# Altium PCB PCB1.PcbDoc
Units mil, origin at the board's own origin, x right, y up, seen from the top; angles counter-clockwise.
Board outline 1628.8 x 2691.79 mil, 2 copper layers (Top Layer, Bottom Layer); 32 components, 24 nets, 140 pads, 4 vias.
Unrouted connection lines stored in the file: 74.
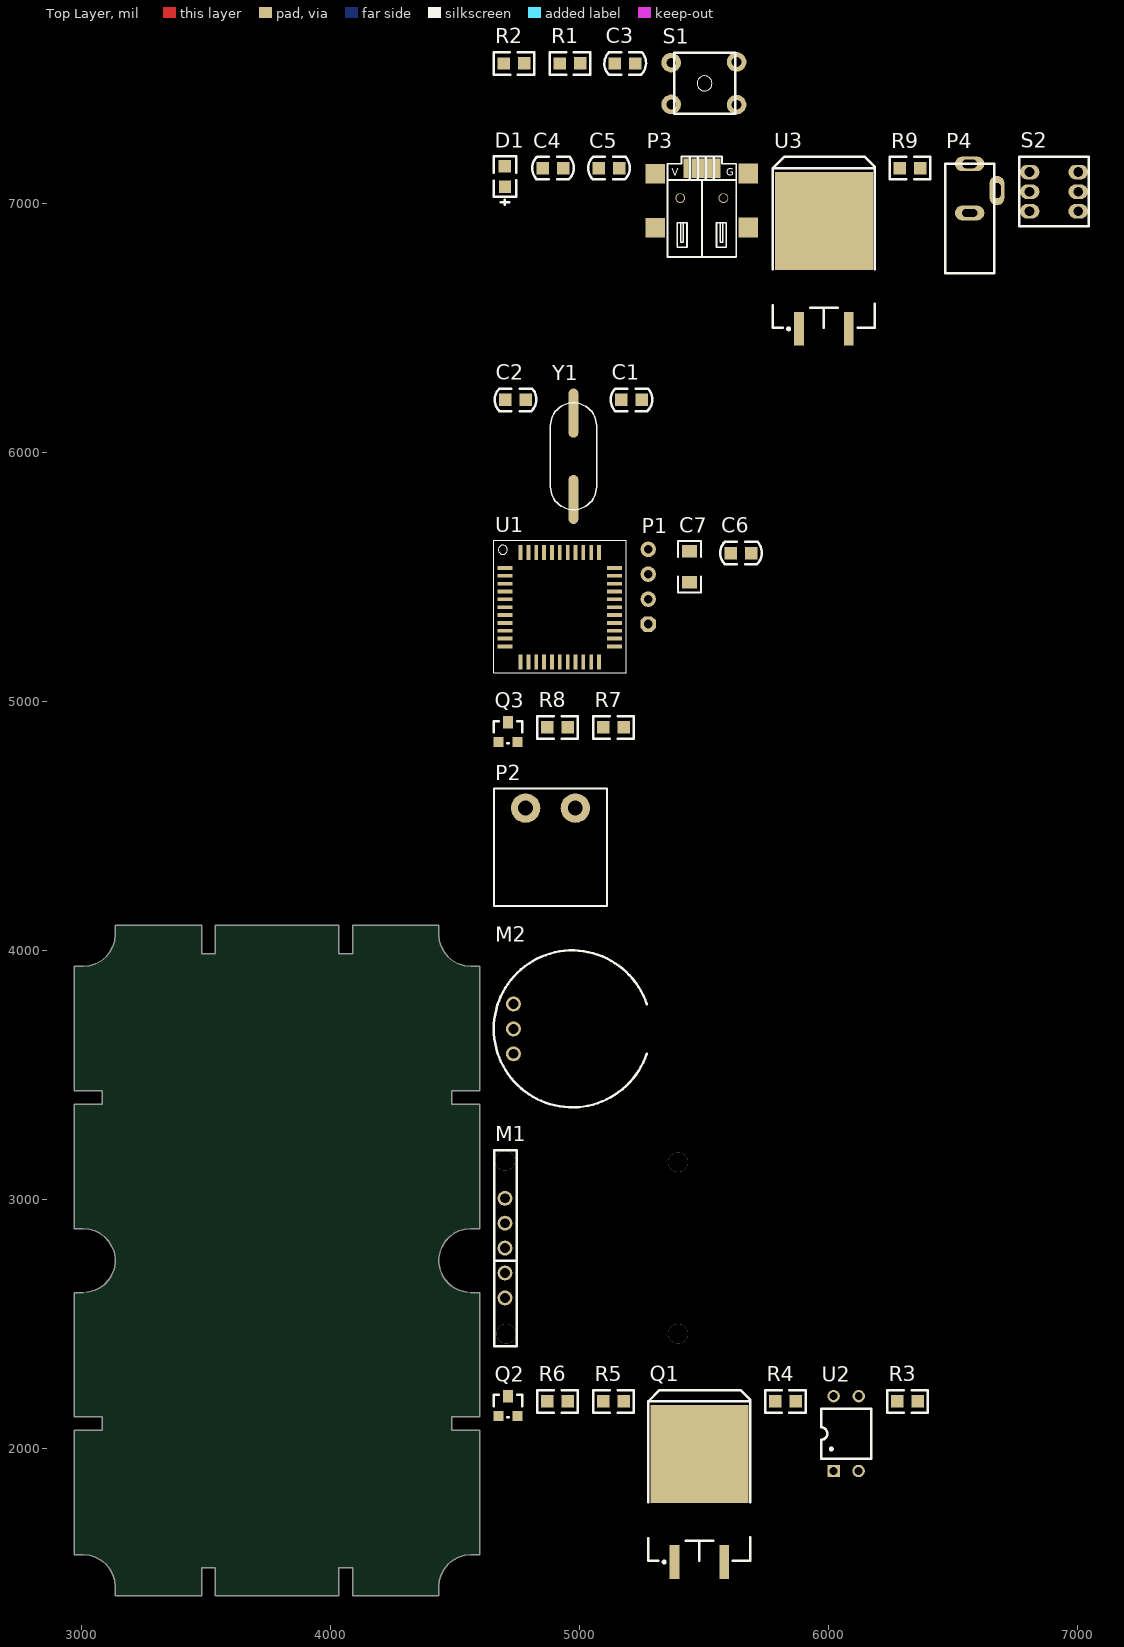
[diagram p0: Top Layer view]
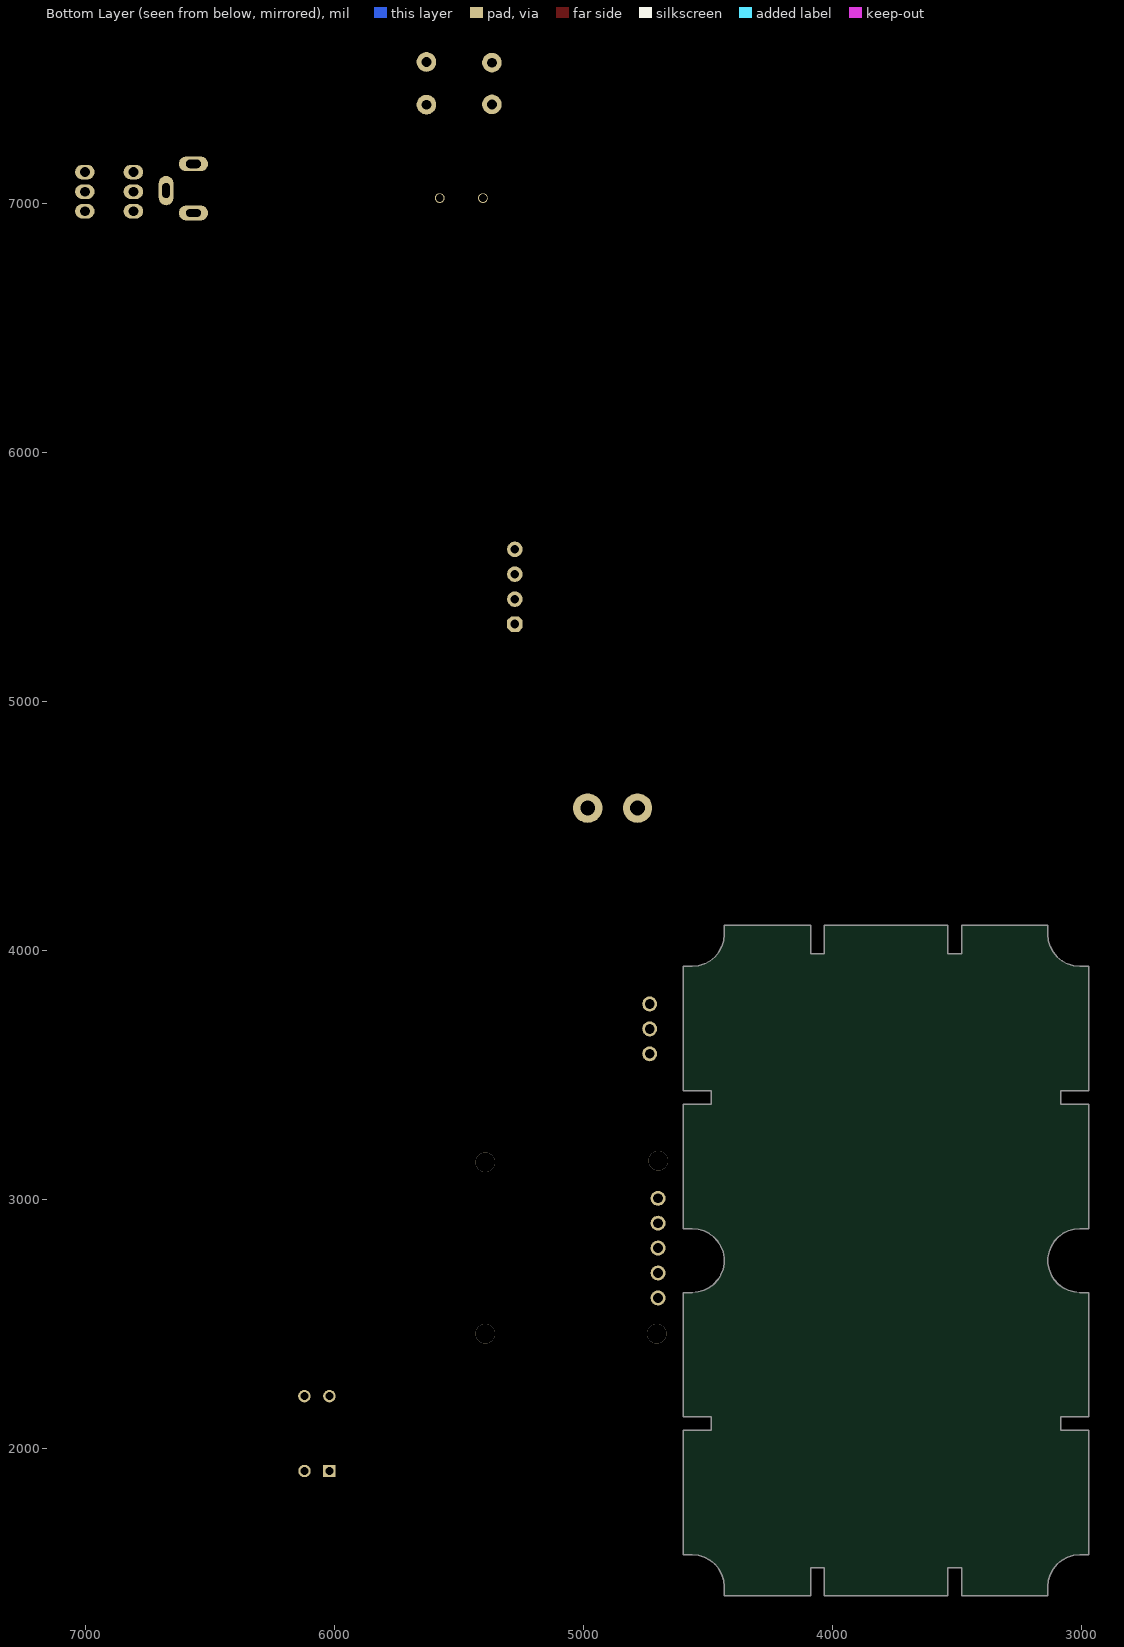
[diagram p1: Bottom Layer view, seen from below]

## Layer stack, top to bottom
Top Solder: solder mask 0.4, Solder Resist, Dk 3.5
Top Layer: signal copper 1.4
Dielectric 1: dielectric 12.6, FR-4, Dk 4.8
Bottom Layer: signal copper 1.4
Bottom Solder: solder mask 0.4, Solder Resist, Dk 3.5

## Board outline
4599.4,3381.97 4485.79,3381.97 4485.79,3437.09 4599.4,3437.09 4599.4,3935.84 4562.56,3935.84 4537.55,3938.3 4513.49,3945.6 4491.33,3957.45 4471.9,3973.39 4455.95,3992.82 4444.1,4014.99 4436.81,4039.04 4434.34,4064.05 4434.34,4100.89 4088.15,4100.89 4088.15,3987.28 4033.03,3987.28 4033.03,4100.89 3536.97,4100.89 3536.97,3987.28 3481.85,3987.28 3481.85,4100.89 3135.66,4100.89 3135.66,4064.05 3133.19,4039.04 3125.9,4014.99 3114.05,3992.82 3098.1,3973.39 3078.67,3957.45 3056.51,3945.6 3032.45,3938.3 3007.44,3935.84 2970.6,3935.84 2970.6,3437.09 3084.21,3437.09 3084.21,3381.97 2970.6,3381.97 2970.6,2883.22 3007.44,2883.22 3031,2881.03 3053.76,2874.56 3074.94,2864.01 3093.82,2849.75 3109.76,2832.27 3122.21,2812.15 3130.76,2790.09 3135.11,2766.83 3135.11,2743.17 3130.76,2719.91 3122.21,2697.85 3109.76,2677.73 3093.82,2660.25 3074.94,2645.99 3053.76,2635.44 3031,2628.97 3007.44,2626.78 2970.6,2626.78 2970.6,2128.03 3084.21,2128.03 3084.21,2072.91 2970.6,2072.91 2970.6,1574.16 3007.44,1574.16 3032.45,1571.7 3056.51,1564.4 3078.67,1552.55 3098.1,1536.61 3114.05,1517.18 3125.9,1495.01 3133.19,1470.96 3135.66,1445.94 3135.66,1409.11 3481.85,1409.11 3481.85,1522.72 3536.97,1522.72 3536.97,1409.11 4033.03,1409.11 4033.03,1522.72 4088.15,1522.72 4088.15,1409.11 4434.34,1409.11 4434.34,1445.94 4436.81,1470.96 4444.1,1495.01 4455.95,1517.18 4471.9,1536.61 4491.33,1552.55 4513.49,1564.4 4537.55,1571.7 4562.56,1574.16 4599.4,1574.16 4599.4,2072.91 4485.79,2072.91 4485.79,2128.03 4599.4,2128.03 4599.4,2626.78 4562.56,2626.78 4539,2628.97 4516.24,2635.44 4495.06,2645.99 4476.18,2660.25 4460.24,2677.73 4447.79,2697.85 4439.24,2719.91 4434.89,2743.17 4434.89,2766.83 4439.24,2790.09 4447.79,2812.15 4460.24,2832.27 4476.18,2849.75 4495.06,2864.01 4516.24,2874.56 4539,2881.03 4562.56,2883.22 4599.4,2883.22

## Design rules (kind name [scope] priority, off if disabled: settings)
Clearance [All] p1: gap=10
PolygonConnect [All] p1: connectstyle=Relief reliefconductorwidth=10 reliefentries=4 polygonreliefangle="90 Angle" airgapwidth=10
RoomDefinition Reset [InComponentClass('Reset')] p1: confinementstyle=ConfineIn formatcopy=TRUE lockcomponents=FALSE outline 4645,7345 5680,7345 5680,7720 4645,7720
RoomDefinition Power [InComponentClass('Power')] p2: confinementstyle=ConfineIn formatcopy=TRUE lockcomponents=FALSE outline 4640,6415 7055,6415 7055,7300 4640,7300
RoomDefinition Oscillator [InComponentClass('Oscillator')] p3: confinementstyle=ConfineIn formatcopy=TRUE lockcomponents=FALSE outline 4645,5700 5305,5700 5305,6370 4645,6370
RoomDefinition Microcontroller_STC12C5A60S2 [InComponentClass('Microcontroller_STC12C5A60S2')] p4: confinementstyle=ConfineIn formatcopy=TRUE lockcomponents=FALSE outline 4645,5105 5745,5105 5745,5755 4645,5755
RoomDefinition Level_Switch [InComponentClass('Level_Switch')] p5: confinementstyle=ConfineIn formatcopy=TRUE lockcomponents=FALSE outline 4640,4805 5230,4805 5230,5055 4640,5055
RoomDefinition LED [InComponentClass('LED')] p6: confinementstyle=ConfineIn formatcopy=TRUE lockcomponents=FALSE outline 4645,4165 5120,4165 5120,4760 4645,4760
RoomDefinition Human_Body_Detection [InComponentClass('Human_Body_Detection')] p7: confinementstyle=ConfineIn formatcopy=TRUE lockcomponents=FALSE outline 4645,3360 5300,3360 5300,4110 4645,4110
RoomDefinition Gesture_Recognition [InComponentClass('Gesture_Recognition')] p8: confinementstyle=ConfineIn formatcopy=TRUE lockcomponents=FALSE outline 4645,2400 5450,2400 5450,3310 4645,3310
RoomDefinition Amplifier [InComponentClass('Amplifier')] p9: confinementstyle=ConfineIn formatcopy=TRUE lockcomponents=FALSE outline 4640,1465 6410,1465 6410,2350 4640,2350
RoutingVias [All] p1: holewidth=28 width=50 viastyle="Through Hole" minholewidth=28 minwidth=50 maxholewidth=28 maxwidth=50
SolderMaskExpansion [All] p1: expansion=4
Width [All] p1: maxlimit=10 minlimit=10 preferedwidth=10
29 further rules are at their usual default settings.

## Classes and differential pairs
component class Reset: C3 R1 R2 S1
component class Power: C4 C5 D1 P3 P4 R9 S2 U3
component class Oscillator: C1 C2 Y1
component class Microcontroller_STC12C5A60S2: C6 C7 P1 U1
component class Level_Switch: Q3 R7 R8
component class LED: P2
component class Human_Body_Detection: M2
component class Gesture_Recognition: M1
component class Amplifier: Q1 Q2 R3 R4 R5 R6 U2

## Components (designator, comment, footprint, x,y, rotation, side; value= is the part's Value field where it differs from the comment)
C1 "Cap" C0805 5160,6210 r0 top
C2 "Cap" C0805 4695,6210 r0 top
C3 "Cap" C0805 5135,7560 r0 top
C4 "Cap" C0805 4845,7140 r0 top
C5 "Cap" C0805 5070,7140 r0 top
C6 "Cap" C0805 5600,5595 r0 top
C7 "Cap" 1206C 5440,5540 r90 top
D1 "LED" L0805R 4700,7065 r90 top
M1 "PAJ7620U2" PAJ7620U2_Interface 5050,2805 r0 top
M2 "Human_Sensor" PM-6 4970,3685 r0 top
P1 "Header 4" HDR1X4HA 5275,5310 r90 top
P2 "Header 2" CCM-5.08-2P 4655,4650 r0 top
P3 "USB" USB-MINI 5490,6975 r0 top
P4 "Power_Connect" DC_002 6565,6960 r90 top
Q1 "MOSFET-N" TO-263 5480,1545 r0 top
Q2 "NPN" SOT-23 4670,2130 r0 top
Q3 "NPN" SOT-23 4670,4835 r0 top
R1 "Res1" R0805 4920,7560 r0 top
R2 "Res1" R0805 4695,7560 r0 top
R3 "Res1" R0805 6275,2190 r0 top
R4 "Res1" R0805 5785,2190 r0 top
R5 "Res1" R0805 5095,2190 r0 top
R6 "Res1" R0805 4870,2190 r0 top
R7 "Res1" R0805 5095,4895 r0 top
R8 "Res1" R0805 4870,4895 r0 top
R9 "Res1" R0805 6285,7140 r0 top
S1 "SW-PB" KEY-DIP4 5500,7480 r0 top
S2 "SW-PB" SW7X7 6765,7185 r0 top
U1 "STC12C5A60S2_44PIN" STC12C5A60S2_44PIN 4700,5535 r0 top
U2 "Optoisolator1" DIP_4 6175,2065 r0 top
U3 "LM7805" TO-263 5980,6495 r0 top
Y1 "XTAL" XTAL-HC49S-SMD 4975,5885 r90 top

## Footprints (in the part's own frame and the unit in brackets; to place one, negate y for a bottom-side part, rotate by r counter-clockwise, add the part's x,y. Pads: shape width x height; smd on the part's side, far side on the other; paste and mask are expansions set on the pad)
1206C [mil] "3.2mmx1.6mm（蒜米工坊）"
  rect 50x60 smd: 1(-62,0) 2(62,0)
  silkscreen extent -103,-46 103,46, body extent -64,-32 62,31, height 24
C0805 [mil]
  rect 50x50 smd: 1(6,0) 2(88.7,-0.1)
  silkscreen extent -36,-45 131,45, body extent -6,-26 112,29, height 37
CCM-5.08-2P [mm]
  round 3 hole 1.5: 1(3.24,-2) 2(8.32,-2)
  silkscreen extent 0,-12 11.56,0, body extent 0.06,-12 11.62,0, height 8.5
DC_002 [mm]
  round 1.5 hole 0.8: 1(0,0.356) 1(0,-0.381) 2(5.004,-0.33) 2(5.004,0.33) 3(1.956,-2.794) 3(2.642,-2.794)
  oval 1.5x3 hole 0.8 slot 1.5 at 90 deg: 1(0,0)
  oval 1.5x3 hole 0.86 slot 1.5 at 90 deg: 2(5.004,0)
  oval 3x1.5 hole 0.8 slot 1.5 at 0 deg: 3(2.286,-2.794)
  silkscreen extent -6.12,-2.51 5,2.49, body extent -6.26,-2.96 5.34,2.44, height 7.4
DIP_4 [mil]
  rect 50x50 hole 32: 1(-155.68,-154.68)
  round 50 hole 32: 2(-55.68,-154.68) 3(-55,145.5) 4(-155.5,145.5)
  silkscreen extent -206,-105 -5,95, body extent -214,-162 4,152, height 168
HDR1X4HA [mil]
  oct 62x62 hole 35: 1(0,0)
  round 62 hole 35: 2(100,0) 3(200,0) 4(300,0)
KEY-DIP4 [mm] "6X6"
  round 2 hole 1: 1(-3.373,2.116) 1(3.299,2.189) 2(-3.373,-2.134) 2(3.299,-2.172)
  silkscreen extent -3.06,-3.09 3.13,3.1, body extent -4.12,-3.27 4.14,3.23, height 4.3
L0805R [mil] "1/8W"
  rect 50x50 smd: 1(0,0) 2(82.3,0.2)
  silkscreen extent -72,-45 122,45, body extent 0,-25 79,25, height 43
PAJ7620U2_Interface [mil]
  round 60 hole 39.37: 1(-350,-200) 2(-350,-100) 3(-350,0) 4(-350,100) 5(-350,200)
  silkscreen extent -394,-394 -303,394, body extent -394,-394 394,394, height 210
PM-6 [mil] "Human_Sensor"
  round 60 hole 39.37: 1(-236.22,-100) 2(-236.22,0) 3(-236.22,100)
  silkscreen extent -315,-315 299,315, body extent -306,-300 321,319, height 460
R0805 [mil] "1/8W"
  rect 50x50 smd: 1(0,0) 2(82.3,0.2)
  silkscreen extent -40,-45 122,45, body extent 1,-24 80,25, height 22
SOT-23 [mil]
  rect 40x40 smd: 1(4.88,0.63) 2(79.88,0.63)
  rect 40x50 smd: 3(41.88,80.63)
  silkscreen extent -15,-4 100,86, body extent -15,-11 99,99, height 47
STC12C5A60S2_44PIN [mil]
  rect 60x15 smd: 1(-0.01,-0.03) 2(-0.01,-31.53) 3(-0.01,-63.02) 4(-0.01,-94.52) 5(-0.01,-126.02) 6(-0.01,-157.51) 7(-0.01,-189.01) 8(-0.01,-220.5) 9(-0.01,-252) 10(-0.01,-283.5) 11(-0.01,-314.99) 23(439.99,-314.99) 24(439.99,-283.5) 25(439.99,-252) 26(439.99,-220.5) 27(439.99,-189.01) 28(439.99,-157.51) 29(439.99,-126.02) 30(439.99,-94.52) 31(439.99,-63.02) 32(439.99,-31.53) 33(439.99,-0.03)
  rect 15x60 smd: 12(62.51,-377.51) 13(94.01,-377.51) 14(125.5,-377.51) 15(157,-377.51) 16(188.5,-377.51) 17(219.99,-377.51) 18(251.49,-377.51) 19(282.98,-377.51) 20(314.48,-377.51) 21(345.98,-377.51) 22(377.47,-377.51) 34(377.47,62.49) 35(345.98,62.49) 36(314.48,62.49) 37(282.98,62.49) 38(251.49,62.49) 39(219.99,62.49) 40(188.5,62.49) 41(157,62.49) 42(125.5,62.49) 43(94.01,62.49) 44(62.51,62.49)
  silkscreen extent -46,-420 486,111, body extent -16,-396 456,76, height 41
SW7X7 [mm]
  oval 2x1.5 hole 1: 1(1.041,-1.549) 1(5.994,-1.549) 2(1.041,-3.543) 2(5.994,-3.543) 3(1.041,-5.537) 3(5.994,-5.537)
  silkscreen extent 0,-7.09 7.09,0.03, body extent -0.02,-7.09 6.98,-0.09, height 13
TO-263 [mm]
  rect 1x3.45 smd: 1(-2.54,0) 3(2.54,0)
  rect 10x10 smd: 2(0,11)
  silkscreen extent -5.21,-0.12 5.21,17.53, body extent -5.08,-0.65 5.08,14.61, height 4.88
USB-MINI [mm]
  rect 2x2 smd: 0(-4.746,-1.872) 0(-4.746,3.612)
  round 1 hole 0.8: 0(-2.2,1.128) 0(2.2,1.128)
  rect 2x2.032 smd: 0(4.746,-1.872) 0(4.746,3.628)
  rect 0.52x2 smd: 1(-1.626,4.166) 2(-0.813,4.166) 3(0,4.166) 4(0.813,4.166) 5(1.626,4.166)
  silkscreen extent -3.5,-4.87 3.5,5.38, body extent -5.32,-4.63 5.38,4.57, height 3.95
XTAL-HC49S-SMD [mm]
  oval 5x1 smd: 1(-1.9,0) 2(6.9,0)
  silkscreen extent -2.95,-2.35 7.95,2.35, body extent -3.75,-2.4 8.75,2.4, height 4.02

## Part data
C1 C2 C3 C4 C5 C6 C7: "Non-Polar Capacitor"
D1: "Typical INFRARED GaAs LED"
M1: library part PAJ7620U2_Interface
P1: "Header, 4-Pin"
P2: "Header, 2-Pin"
P3: library part USBPort
P4: library part Power
Q1: "N-Channel MOSFET"
Q2 Q3: "NPN Bipolar Transistor"
R1 R2 R3 R4 R5 R6 R7 R8 R9: "Resistor"
S1 S2: "Switch"
U1: "MCU"
U2: "4-Pin Phototransistor Optocoupler"
Y1: library part XTAL_1, "Crystal Oscillator"

## Via types
v1: diameter 78.74, hole 78.74, Top Layer to Bottom Layer, 4 vias

## Nets (pads, with @x,y where several pads share a name; then routed paths per layer and width w, separated by ;. In a path a pad name is that pad's centre, name@x,y a point inside that pad or via, vN(x,y) a via of type N, cw(c..) or ccw(c..) an arc to the next point about the centre after c; other vN are vias at no path point)
GND: C1.2 C2.2 C4.1 C5.1 C6.1 C7.1 D1.2 M1.1 M2.3 P1.3 P3.0 P3.5 P4.1 P4.3 Q1.3 Q2.2 Q3.2 R2.1 R6.1 U1.16 U3.2
INT0: M1.4 U1.8
INT1: Q3.3 R7.1 U1.9
NetD1_1: D1.1 R9.1
NetM2_1: M2.1 R8.1
NetQ1_1: Q1.1 R4.1
NetQ2_1: Q2.3 U2.2
NetQ2_2: Q2.1 R5.2
NetQ3_2: Q3.1 R8.2
NetR1_2: R1.2 S1.2
NetR3_1: R3.1 U2.1
NetR4_2: R4.2 R6.2 U2.3
PWM: R5.1 U1.43
PWM_GND: P2.2 Q1.2
PWM_VCC: C5.2 P2.1 R3.2 S2.1 U2.4 U3.1
RST: C3.2 R1.1 R2.2 U1.4
RX: P1.1 U1.5
SCL: M1.5 U1.24
SDA: M1.3 U1.22
TX: P1.2 U1.7
VBAT: C3.1 C4.2 C6.2 C7.2 M1.2 M2.2 P1.4 R7.2 R9.2 S1.1 U1.29 U1.38 U3.3
VIN: P3.1 P4.2 S2.2
XTAL1: C2.1 U1.15 Y1.1
XTAL2: C1.1 U1.14 Y1.2
pads on no net: P3.2 P3.3 P3.4 S2.3 U1.1 U1.2 U1.3 U1.6 U1.10 U1.11 U1.12 U1.13 U1.17 U1.18 U1.19 U1.20 U1.21 U1.23 U1.25 U1.26 U1.27 U1.28 U1.30 U1.31 U1.32 U1.33 U1.34 U1.35 U1.36 U1.37 U1.39 U1.40 U1.41 U1.42 U1.44
copper on no net:
  other v1: 4705.51,2460.51 5394.49,2460.51 5394.49,3149.49 4700,3155

## Text inside footprints (layer, text, board x,y; h text height)
P3: Top Overlay "G" at 5589,7110 h30; Top Overlay "V" at 5370,7110 h30